# Altium PCB Bing Bong.PcbDoc
Units mm, origin at the board's own origin, x right, y up, seen from the top; angles counter-clockwise.
Board outline 152.4 x 101.6 mm, 4 copper layers (Top Layer, GND, PWR, Bottom Layer), stack 0.603 mm thick; 143 components, 92 nets, 472 pads, 8 vias.
Unrouted connection lines stored in the file: 266.
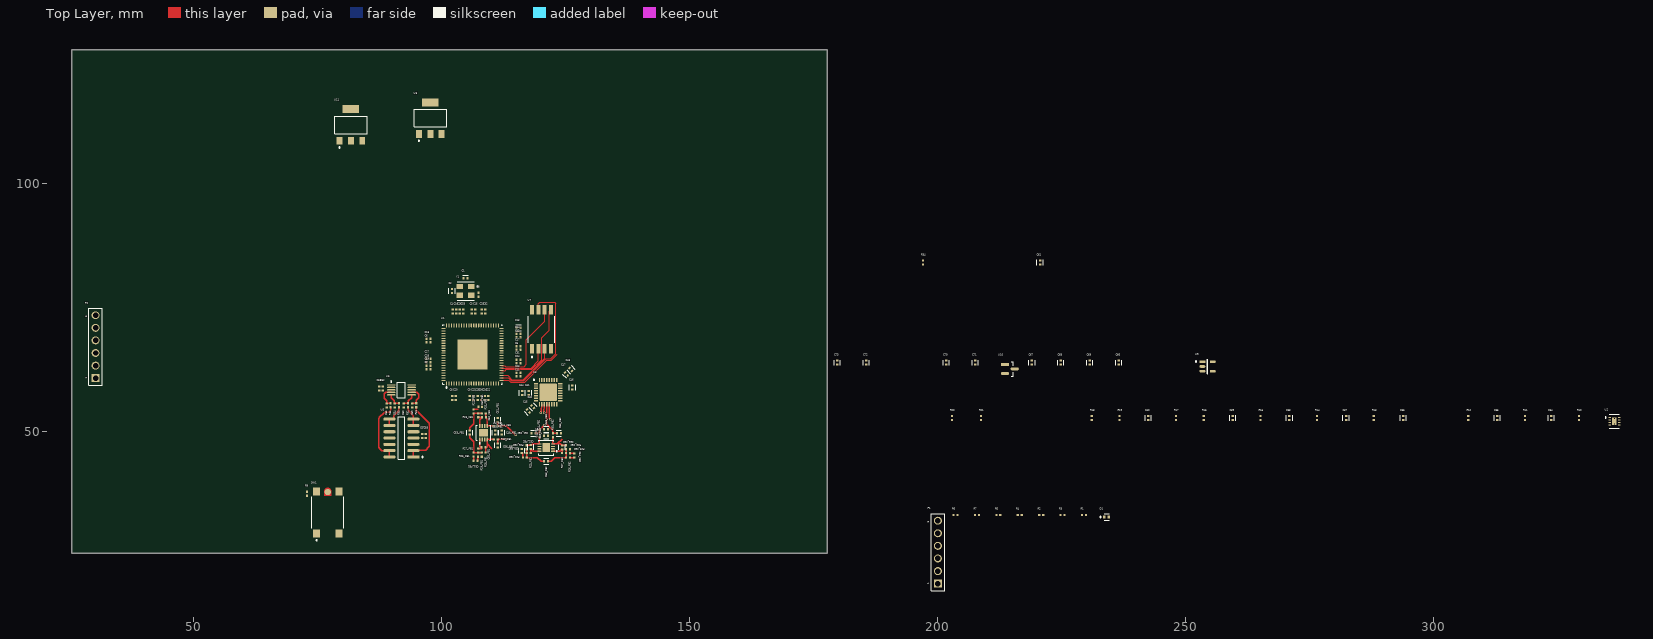
[diagram p0: Top Layer view]
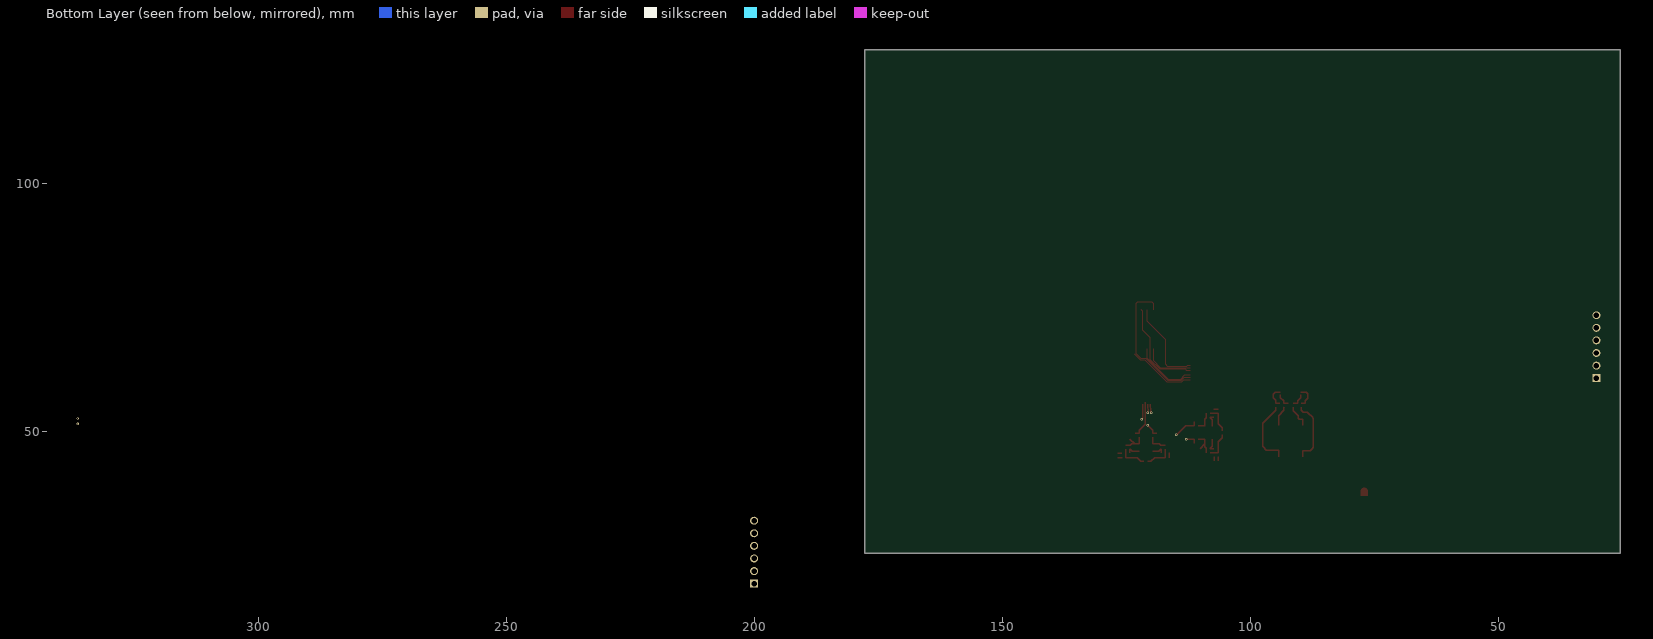
[diagram p1: Bottom Layer view, seen from below]
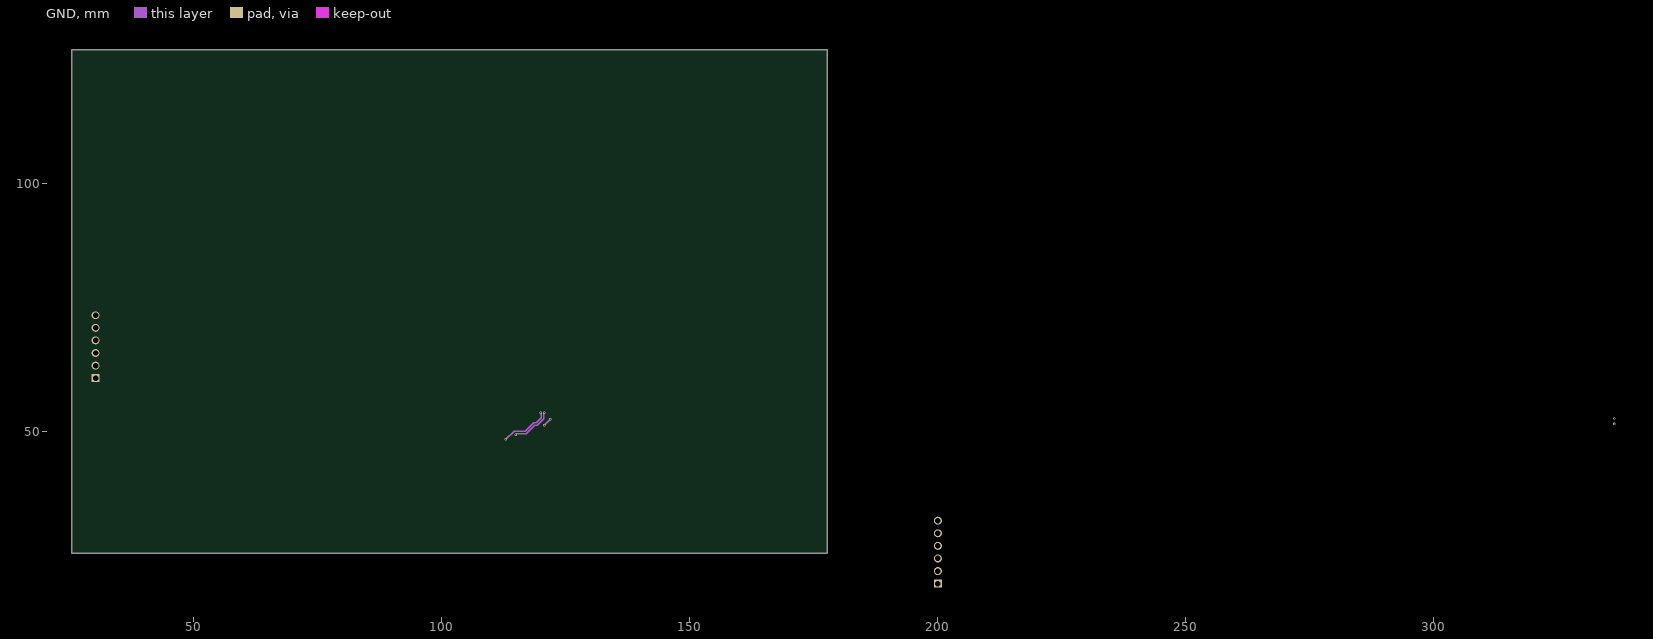
[diagram p2: GND]

## Layer stack, top to bottom
Top Solder: solder mask 0.0102, Solder Resist, Dk 3.5
Top Layer: signal copper 0.0356
Dielectric 2: prepreg 0.0711, PP-006, Dk 4.1
GND: signal copper 0.035
Dielectric 1: dielectric 0.32, FR-4, Dk 4.8
PWR: signal copper 0.035
Dielectric 3: prepreg 0.0711, PP-006, Dk 4.1
Bottom Layer: signal copper 0.0356
Bottom Solder: solder mask 0.0102, Solder Resist, Dk 3.5

## Board outline
25.4,25.4 177.8,25.4 177.8,127 25.4,127

## Design rules (kind name [scope] priority, off if disabled: settings)
Clearance [All] p1: gap=0.254 ignorepadtopadclearanceinfootprint=TRUE except(0.13: Arc-Arc Arc-Track Arc-SMDPad Track-Track Track-SMDPad; 0.2: Arc-THPad Arc-Via Track-THPad Track-Via SMDPad-SMDPad SMDPad-THPad SMDPad-Via THPad-THPad THPad-Via Via-Via)
DiffPairsRouting [All] p1: maxlimit=0.254 minlimit=0.2 mostfreqgap=0.254 toplayer_minwidth=0.1 toplayer_maxwidth=0.381 toplayer_prefwidth=0.381 midlayer1_minwidth=0.1 midlayer1_maxwidth=0.381 midlayer1_prefwidth=0.381 midlayer2_minwidth=0.1 midlayer2_maxwidth=0.381 midlayer2_prefwidth=0.381 bottomlayer_minwidth=0.1 bottomlayer_maxwidth=0.381 bottomlayer_prefwidth=0.381 maxuncoupledlength=12.7
PolygonConnect [All] p1: connectstyle=Relief reliefconductorwidth=0.254 reliefentries=4 polygonreliefangle="90 Angle" airgapwidth=0.254
RoomDefinition FB1 [InComponentClass('FB1')] p1: confinementstyle=ConfineIn formatcopy=TRUE lockcomponents=FALSE outline 104.95,43.25 112.95,43.25 112.95,55.575 104.95,55.575
RoomDefinition FB2 [InComponentClass('FB2')] p2: confinementstyle=ConfineIn formatcopy=TRUE lockcomponents=FALSE outline 127.6,43.25 127.6,51.25 112.95,51.25 112.95,43.25
RoutingVias [All] p1: holewidth=0.3 width=0.5 viastyle="Through Hole" minholewidth=0.2 minwidth=0.4 maxholewidth=1.27 maxwidth=1.27
SolderMaskExpansion [All] p1: expansion=0.102 istentingtop=FALSE
Width [All] p1: maxlimit=5 minlimit=0.1 preferedwidth=0.254 midlayer1_minwidth=0.254 midlayer1_maxwidth=0.254 midlayer2_minwidth=0.254 midlayer2_maxwidth=0.254 minimp=50.000000 maximp=50.000000 favimp=50.000000
29 further rules are at their usual default settings.

## Classes and differential pairs
net class IN_P[1..2]: IN_P1 IN_P2
net class IN_N[1..2]: IN_N1 IN_N2
channel class "Filters n Buffers": FB1 FB2
net class "Au In [1..2]": "Au In 1" "Au In 2"
component class FB2: C48_FB2 C49_FB2 C50_FB2 C51_FB2 C52_FB2 C53_FB2 C54_FB2 C55_FB2 C56_FB2 R22_FB2 R23_FB2 R24_FB2 R25_FB2 R26_FB2 R27_FB2 R28_FB2 R29_FB2 R30_FB2 U4_FB2
component class FB1: C48_FB1 C49_FB1 C50_FB1 C51_FB1 C52_FB1 C53_FB1 C54_FB1 C55_FB1 C56_FB1 R22_FB1 R23_FB1 R24_FB1 R25_FB1 R26_FB1 R27_FB1 R28_FB1 R29_FB1 R30_FB1 U4_FB1
component class Designator: C57 C58 C59 C60 C61 C62 C63 C64 C65 P2 R31 R32 R33 R34 R35 U5 U6 U7
differential pair IN2: +IN_P2 -IN_N2
differential pair IN1: +IN_P1 -IN_N1

## Components (designator, comment, footprint, x,y, rotation, side; value= is the part's Value field where it differs from the comment)
C1 "18pF" FP-GRM15-MFG 104.825,80.875 r0 top value=0.10μF
C2 "18pF" FP-GRM15-MFG 102.1,78.325 r270 top value=0.10μF
C3 "1uF" FP-GRM15-MFG 106.125,74.2 r270 top value=0.10μF
C4 "1uF" FP-GRM15-MFG 102.225,74.175 r270 top value=0.10μF
C5 "1uF" FP-GRM15-MFG 115.525,66.45 r180 top value=0.10μF
C6 "1uF" FP-GRM15-MFG 97.325,67.975 r0 top value=0.10μF
C7 "1uF" FP-GRM15-MFG 97.325,62.575 r0 top value=0.10μF
C8 "1uF" FP-GRM15-MFG 102.125,56.75 r90 top value=0.10μF
C9 "1uF" FP-GRM15-MFG 105.7,56.75 r90 top value=0.10μF
C10 "1uF" FP-GRM15-MFG 108.7,56.75 r90 top value=0.10μF
C11 "1uF" FP-GRM15-MFG 115.55,61.1 r180 top value=0.10μF
C12 "1uF" FP-GRM15-MFG 115.525,68.975 r180 top value=0.10μF
C13 "47pF" FP-GRM15-MFG 115.525,70.9 r180 top value=0.10μF
C14 "0.1uF" FP-GRM15-MFG 115.525,69.675 r180 top value=0.10μF
C15 "0.1uF" FP-GRM15-MFG 106.825,74.2 r270 top value=0.10μF
C16 "0.1uF" FP-GRM15-MFG 102.919,74.175 r270 top value=0.10μF
C17 "0.1uF" FP-GRM15-MFG 115.526,67.149 r180 top value=0.10μF
C18 "0.1uF" FP-GRM15-MFG 97.325,68.675 r0 top value=0.10μF
C19 "0.1uF" FP-GRM15-MFG 97.325,63.275 r0 top value=0.10μF
C20 "0.1uF" FP-GRM15-MFG 102.825,56.75 r90 top value=0.10μF
C21 "0.1uF" FP-GRM15-MFG 106.4,56.75 r90 top value=0.10μF
C22 "0.1uF" FP-GRM15-MFG 109.4,56.75 r90 top value=0.10μF
C23 "0.1uF" FP-GRM15-MFG 115.55,61.801 r180 top value=0.10μF
C24 "0.1uF" FP-GRM15-MFG 115.55,63.806 r180 top value=0.10μF
C25 "0.1uF" FP-GRM15-MFG 108.1,74.2 r270 top value=0.10μF
C26 "0.1uF" FP-GRM15-MFG 103.625,74.175 r270 top value=0.10μF
C27 "0.1uF" FP-GRM15-MFG 97.325,64.675 r0 top value=0.10μF
C28 "0.1uF" FP-GRM15-MFG 97.325,63.975 r0 top value=0.10μF
C29 "1uF" FP-GRM15-MFG 107.25,56.757 r90 top value=0.10μF
C30 "1uF" FP-GRM15-MFG 107.95,56.75 r90 top value=0.10μF
C31 "1uF" FP-GRM15-MFG 115.55,64.5 r180 top value=0.10μF
C32 "1uF" FP-GRM15-MFG 108.8,74.2 r270 top value=0.10μF
C33 "1uF" FP-GRM15-MFG 104.325,74.175 r270 top value=0.10μF
C34 "1nF" FP-GRM15-MFG 323.85,52.705 r90 top value=0.10μF
C35 "10uF" FP-GRM15-MFG 312.928,52.705 r90 top value=0.10μF
C36 "10uF" FP-GRM15-MFG 294.005,52.705 r90 top value=0.10μF
C37 "1nF" FP-GRM15-MFG 282.448,52.705 r90 top value=0.10μF
C38 "1nF" FP-GRM15-MFG 271.018,52.705 r90 top value=0.10μF
C39 "10uF" FP-GRM15-MFG 259.588,52.705 r90 top value=0.10μF
C40 "1nF" FP-GRM15-MFG 242.57,52.705 r90 top value=0.10μF
C41 "0.1uF" FP-GRM15-MFG 117.55,57.75 r270 top value=0.10μF
C42 "0.1uF" FP-GRM15-MFG 118.392,54.983 r135 top value=0.10μF
C43 "0.1uF" FP-GRM15-MFG 126.05,62.5 r315 top value=0.10μF
C44 "10uF" FP-GRM15-MFG 116.3,57.75 r270 top value=0.10μF
C45 "10uF" FP-GRM15-MFG 117.492,54.108 r135 top value=0.10μF
C46 "0.1uF" FP-GRM15-MFG 126.4,58.875 r90 top value=0.10μF
C47 "10uF" FP-GRM15-MFG 125.167,61.608 r315 top value=0.10μF
C48_FB1 "1uF" FP-GRM15-MFG 112.125,49.75 r270 top value=0.10μF (schematic designator C48)
C48_FB2 "1uF" FP-GRM15-MFG 121.1,50.425 r0 top value=0.10μF (schematic designator C48)
C49_FB1 "0.1uF" FP-GRM15-MFG 110.825,49.75 r270 top value=0.10μF (schematic designator C49)
C49_FB2 "0.1uF" FP-GRM15-MFG 121.1,49.125 r0 top value=0.10μF (schematic designator C49)
C50_FB1 "10uF" FP-GRM15-MFG 107.8,54.95 r0 top value=0.10μF (schematic designator C50)
C50_FB2 "10uF" FP-GRM15-MFG 116.15,46.1 r90 top value=0.10μF (schematic designator C50)
C51_FB1 "DNP!" FP-GRM15-MFG 111.325,52.325 r270 top value=0.10μF (schematic designator C51)
C51_FB2 "DNP!" FP-GRM15-MFG 118.525,49.625 r0 top value=0.10μF (schematic designator C51)
C52_FB1 "1nF" FP-GRM15-MFG 108.525,52.85 r0 top value=0.10μF (schematic designator C52)
C52_FB2 "1nF" FP-GRM15-MFG 118,46.85 r90 top value=0.10μF (schematic designator C52)
C53_FB1 "6.8nF" FP-GRM15-MFG 105.7,49.75 r90 top value=0.10μF (schematic designator C53)
C53_FB2 "6.8nF" FP-GRM15-MFG 121.1,44 r180 top value=0.10μF (schematic designator C53)
C54_FB1 "10uF" FP-GRM15-MFG 106.85,44.05 r180 top value=0.10μF (schematic designator C54)
C54_FB2 "10uF" FP-GRM15-MFG 126.8,45.15 r270 top value=0.10μF (schematic designator C54)
C55_FB1 "1nF" FP-GRM15-MFG 108.5,46.8 r180 top value=0.10μF (schematic designator C55)
C55_FB2 "1nF" FP-GRM15-MFG 124.3,46.8 r270 top value=0.10μF (schematic designator C55)
C56_FB1 "DNP!" FP-GRM15-MFG 111.325,47.2 r90 top value=0.10μF (schematic designator C56)
C56_FB2 "DNP!" FP-GRM15-MFG 123.65,49.625 r180 top value=0.10μF (schematic designator C56)
C57 "0.1uF" FP-GRM15-MFG 96.125,49.1 r270 top value=0.10μF
C58 "1uF" FP-GRM15-MFG 96.825,49.1 r270 top value=0.10μF
C59 "0.1uF" FP-GRM15-MFG 94.1,55.275 r90 top value=0.10μF
C60 "0.1uF" FP-GRM15-MFG 92.4,55.275 r90 top value=0.10μF
C61 "47pF" FP-GRM15-MFG 220.726,84.074 r90 top value=0.10μF
C62 "0.1uF" FP-GRM15-MFG 88.1,58.675 r90 top value=0.10μF
C63 "1uF" FP-GRM15-MFG 87.4,58.675 r90 top value=0.10μF
C64 "0.1uF" FP-GRM15-MFG 90.6,55.275 r90 top value=0.10μF
C65 "0.1uF" FP-GRM15-MFG 88.9,55.275 r90 top value=0.10μF
C66 "0.47uF" FP-GRM15-MFG 236.601,63.881 r90 top value=0.10μF
C67 "0.47uF" FP-GRM15-MFG 219.075,63.881 r90 top value=0.10μF
C68 "0.47uF" FP-GRM15-MFG 224.917,63.881 r90 top value=0.10μF
C69 "0.47uF" FP-GRM15-MFG 230.759,63.881 r90 top value=0.10μF
C70 "0.47uF" FP-GRM15-MFG 201.803,63.881 r90 top value=0.10μF
C71 "0.47uF" FP-GRM15-MFG 207.645,63.881 r90 top value=0.10μF
C72 "0.47uF" FP-GRM15-MFG 185.674,63.881 r90 top value=0.10μF
C73 "0.47uF" FP-GRM15-MFG 179.832,63.881 r90 top value=0.10μF
D1 "SML-P11UTT86" FP-SML-P11UTT86-MFG 234.151,32.766 r0 top
P1 "61300611121" 61300611121 200.115,25.654 r90 top
P2 "61300611121" 61300611121 30.2,67.1 r90 top
R1 "2K2" RESC1005X40X25LL05T05 229.579,33.147 r0 top
R2 "0R" RESC1005X40X25LL05T05 220.943,33.147 r0 top
R3 "DNP!" RESC1005X40X25LL05T05 225.261,33.147 r0 top
R4 "2K2" RESC1005X40X25LL05T05 216.625,33.147 r0 top
R5 "2K2" RESC1005X40X25LL05T05 212.307,33.147 r0 top
R6 "DNP!" RESC1005X40X25LL05T05 203.671,33.147 r0 top
R7 "0R" RESC1005X40X25LL05T05 207.989,33.147 r0 top
R8 "2K" RESC1005X40X25LL05T05 107.425,77.6 r270 top
R9 "10K" RESC1005X40X25LL05T05 72.85,37.45 r270 top
R10 "5K" RESC1005X40X25LL05T05 329.438,52.705 r90 top
R11 "10K" RESC1005X40X25LL05T05 318.516,52.705 r90 top
R12 "10K" RESC1005X40X25LL05T05 307.086,52.705 r90 top
R13 "5K" RESC1005X40X25LL05T05 288.036,52.705 r90 top
R14 "5K" RESC1005X40X25LL05T05 276.606,52.705 r90 top
R15 "10K" RESC1005X40X25LL05T05 265.176,52.705 r90 top
R16 "10K" RESC1005X40X25LL05T05 253.746,52.705 r90 top
R17 "5K" RESC1005X40X25LL05T05 248.158,52.705 r90 top
R18 "0R" RESC1005X40X25LL05T05 231.14,52.705 r90 top
R19 "0R" RESC1005X40X25LL05T05 236.728,52.705 r90 top
R20 "0R" RESC1005X40X25LL05T05 202.946,52.705 r90 top
R21 "0R" RESC1005X40X25LL05T05 208.788,52.705 r90 top
R22_FB1 "1K" RESC1005X40X25LL05T05 106.45,54.05 r270 top (schematic designator R22)
R22_FB2 "1K" RESC1005X40X25LL05T05 116.8,44.75 r0 top (schematic designator R22)
R23_FB1 "2K" RESC1005X40X25LL05T05 107.375,53.25 r270 top (schematic designator R23)
R23_FB2 "2K" RESC1005X40X25LL05T05 117.6,45.675 r0 top (schematic designator R23)
R24_FB1 "0R" RESC1005X40X25LL05T05 110.925,51.125 r0 top (schematic designator R24)
R24_FB2 "0R" RESC1005X40X25LL05T05 119.725,49.225 r90 top (schematic designator R24)
R25_FB1 "2K" RESC1005X40X25LL05T05 108.5,53.65 r180 top (schematic designator R25)
R25_FB2 "2K" RESC1005X40X25LL05T05 117.2,46.8 r270 top (schematic designator R25)
R26_FB1 "1K" RESC1005X40X25LL05T05 106.45,45.35 r90 top (schematic designator R26)
R26_FB2 "1K" RESC1005X40X25LL05T05 125.5,44.75 r180 top (schematic designator R26)
R27_FB1 "2K" RESC1005X40X25LL05T05 107.375,46.15 r90 top (schematic designator R27)
R27_FB2 "2K" RESC1005X40X25LL05T05 124.7,45.675 r180 top (schematic designator R27)
R28_FB1 "2K" RESC1005X40X25LL05T05 108.5,45.75 r180 top (schematic designator R28)
R28_FB2 "2K" RESC1005X40X25LL05T05 125.1,46.8 r270 top (schematic designator R28)
R29_FB1 "10K" RESC1005X40X25LL05T05 107.725,44.925 r0 top (schematic designator R29)
R29_FB2 "10K" RESC1005X40X25LL05T05 125.925,46.025 r90 top (schematic designator R29)
R30_FB1 "0R" RESC1005X40X25LL05T05 110.925,48.4 r0 top (schematic designator R30)
R30_FB2 "0R" RESC1005X40X25LL05T05 122.45,49.225 r90 top (schematic designator R30)
R31 "100R" RESC1005X40X25LL05T05 94.9,55.275 r270 top
R32 "100R" RESC1005X40X25LL05T05 93.2,55.275 r270 top
R33 "100R" RESC1005X40X25LL05T05 91.4,55.275 r270 top
R34 "10K" RESC1005X40X25LL05T05 197.104,84.074 r90 top
R35 "100R" RESC1005X40X25LL05T05 89.7,55.275 r270 top
SW1 "FSM1LP" FP-FSM1LP-MFG 77.037,33.648 r90 top
U1 "ADSP-BF706" FP-CP-88-8-IPC_C 106.244,65.543 r90 top
U2 "OPA2991IDSGR" FP-DSG0008A-MFG 336.55,52.07 r0 top
U3 "ADAU1761" LFCSP-32 121.5,57.925 r0 top
U4_FB1 "AD8137YCPZ-REEL7" FP-CP-8-13-IPC_C 108.45,49.75 r90 top (schematic designator U4)
U4_FB2 "AD8137YCPZ-REEL7" FP-CP-8-13-IPC_C 121.1,46.75 r180 top (schematic designator U4)
U5 "LM2902DR" FP-D0014A-IPC_A 91.9,48.675 r180 top
U6 "ADC084S021CIMM/NOPB" MUB10A_N 91.9,58.375 r0 top
U7 "W25Q32FVSSIG" FP-SS-MFG 120.15,70.6 r90 top
U8 "ZLDO1117QG33TA" FP-SOT223-MFG 97.725,113.2 r90 top
U9 "TLV73311PDBVT" FP-DBV0005A-IPC_C 254.508,63.119 r0 top
U10 "AP2120N-1.8TRG1" FP-SOT23-IPC_A 214.63,62.611 r0 top
U11 "ZLDO1117QG33TA" FP-SOT223-MFG 81.7,111.85 r90 top
Y1 "ABM8-25.000MHZ-B2-T" FP-ABM8-MFG 104.85,78.375 r180 top

## Footprints (in the part's own frame and the unit in brackets; to place one, negate y for a bottom-side part, rotate by r counter-clockwise, add the part's x,y. Pads: shape width x height; smd on the part's side, far side on the other; paste and mask are expansions set on the pad)
61300611121 [mm] "Pin Header, pitch 2.54 mm, THT, Vertical, single row, 6p"
  rect 1.6x1.6 hole 1.1: 1(-6.35,0)
  round 1.6 hole 1.1: 2(-3.81,0) 3(-1.27,0) 4(1.27,0) 5(3.81,0) 6(6.35,0)
  silkscreen extent -7.77,-1.35 7.77,1.35, body extent -7.62,-1.27 7.62,1.27, height 8.57
FP-ABM8-MFG [mm]
  rect 1.3x1.05 smd paste+0 mask+0: 1(-1.15,-0.875) 2(1.15,-0.875) 3(1.15,0.875) 4(-1.15,0.875)
  silkscreen extent -2.5,-1.88 1.7,1.88, body extent -1.9,-1.5 1.9,1.5, height 0.25
FP-CP-8-13-IPC_C [mm]
  rect 0.81x0.242 smd paste+0 mask+0: 1(-1.351,0.75)
  rrect100% 0.81x0.242 smd paste+0 mask+0: 2(-1.351,0.25) 3(-1.351,-0.25) 4(-1.351,-0.75) 5(1.351,-0.75) 6(1.351,-0.25) 7(1.351,0.25) 8(1.351,0.75)
  rect 1.55x1.84 smd paste-1000 mask+0: 9(0,0)
  silkscreen extent -2.28,-1.5 1.5,1.5, body extent -1.86,-1.6 1.86,1.6, height 0.25
FP-CP-88-8-IPC_C [mm]
  rect 0.81x0.222 smd paste+0 mask+0: 1(-5.851,5.25)
  rrect100% 0.81x0.222 smd paste+0 mask+0: 2(-5.851,4.75) 3(-5.851,4.25) 4(-5.851,3.75) 5(-5.851,3.25) 6(-5.851,2.75) 7(-5.851,2.25) 8(-5.851,1.75) 9(-5.851,1.25) 10(-5.851,0.75) 11(-5.851,0.25) 12(-5.851,-0.25) 13(-5.851,-0.75) 14(-5.851,-1.25) 15(-5.851,-1.75) 16(-5.851,-2.25) 17(-5.851,-2.75) 18(-5.851,-3.25) 19(-5.851,-3.75) 20(-5.851,-4.25) 21(-5.851,-4.75) 22(-5.851,-5.25) 45(5.851,-5.25) 46(5.851,-4.75) 47(5.851,-4.25) 48(5.851,-3.75) 49(5.851,-3.25) 50(5.851,-2.75) 51(5.851,-2.25) 52(5.851,-1.75) 53(5.851,-1.25) 54(5.851,-0.75) 55(5.851,-0.25) 56(5.851,0.25) 57(5.851,0.75) 58(5.851,1.25) 59(5.851,1.75) 60(5.851,2.25) 61(5.851,2.75) 62(5.851,3.25) 63(5.851,3.75) 64(5.851,4.25) 65(5.851,4.75) 66(5.851,5.25)
  rrect100% 0.222x0.81 smd paste+0 mask+0: 23(-5.25,-5.851) 24(-4.75,-5.851) 25(-4.25,-5.851) 26(-3.75,-5.851) 27(-3.25,-5.851) 28(-2.75,-5.851) 29(-2.25,-5.851) 30(-1.75,-5.851) 31(-1.25,-5.851) 32(-0.75,-5.851) 33(-0.25,-5.851) 34(0.25,-5.851) 35(0.75,-5.851) 36(1.25,-5.851) 37(1.75,-5.851) 38(2.25,-5.851) 39(2.75,-5.851) 40(3.25,-5.851) 41(3.75,-5.851) 42(4.25,-5.851) 43(4.75,-5.851) 44(5.25,-5.851) 67(5.25,5.851) 68(4.75,5.851) 69(4.25,5.851) 70(3.75,5.851) 71(3.25,5.851) 72(2.75,5.851) 73(2.25,5.851) 74(1.75,5.851) 75(1.25,5.851) 76(0.75,5.851) 77(0.25,5.851) 78(-0.25,5.851) 79(-0.75,5.851) 80(-1.25,5.851) 81(-1.75,5.851) 82(-2.25,5.851) 83(-2.75,5.851) 84(-3.25,5.851) 85(-3.75,5.851) 86(-4.25,5.851) 87(-4.75,5.851) 88(-5.25,5.851)
  rect 6x6 smd paste-1000 mask+0: 89(0,0)
  silkscreen extent -6.78,-6 6,6, body extent -6.36,-6.36 6.36,6.36, height 0.25
FP-D0014A-IPC_A [mm]
  rect 2.474x0.622 smd paste+0 mask+0: 1(-2.416,3.81)
  rrect100% 2.474x0.622 smd paste+0 mask+0: 2(-2.416,2.54) 3(-2.416,1.27) 4(-2.416,0) 5(-2.416,-1.27) 6(-2.416,-2.54) 7(-2.416,-3.81) 8(2.416,-3.81) 9(2.416,-2.54) 10(2.416,-1.27) 11(2.416,0) 12(2.416,1.27) 13(2.416,2.54) 14(2.416,3.81)
  silkscreen extent -4.38,-4.33 0.68,4.33, body extent -4.15,-4.82 4.15,4.82, height 0.25
FP-DBV0005A-IPC_C [mm]
  rect 1.205x0.532 smd paste+0 mask+0: 1(-1.05,0.95)
  rrect100% 1.205x0.532 smd paste+0 mask+0: 2(-1.05,0) 3(-1.05,-0.95) 4(1.05,-0.95) 5(1.05,0.95)
  silkscreen extent -2.45,-1.45 0.05,1.45, body extent -1.75,-1.55 1.75,1.55, height 0.25
FP-DSG0008A-MFG [mm]
  rrect40% 0.5x0.25 smd paste+0 mask+0: 1(-0.95,0.75) 2(-0.95,0.25) 3(-0.95,-0.25) 4(-0.95,-0.75) 5(0.95,-0.75) 6(0.95,-0.25) 7(0.95,0.25) 8(0.95,0.75)
  rrect11% 0.9x1.6 smd paste-1000 mask+0: 9(0,0)
  silkscreen extent -1.87,-1.39 1,1.4, body extent -1.3,-1.15 1.3,1.15, height 0.25
FP-FSM1LP-MFG [mm]
  rect 1.6x1.395 smd paste+0 mask+0: 1(-4.205,2.248) 2(4.205,2.248) 3(-4.205,-2.248) 4(4.205,-2.248)
  round 1.26 smd paste+0 mask+0: 5(4.139,0)
  Top Layer region: 3.405,0.7 4.307,0.7 4.574,0.647 4.801,0.496 4.952,0.269 5.005,0.002 5.005,0.002 5.005,-0.002 4.952,-0.269 4.801,-0.496 4.574,-0.647 4.307,-0.7 4.307,-0.7 3.405,-0.7
  silkscreen extent -5.72,-3.25 3.15,3.25, body extent -5.1,-3.35 5.11,3.35, height 0.25
FP-GRM15-MFG [mm]
  rect 0.4x0.5 smd paste+0 mask+0: 1(-0.4,0) 2(0.4,0)
  silkscreen extent -0.53,-0.63 0.53,0.63, body extent -0.7,-0.38 0.7,0.38, height 0.25
FP-SML-P11UTT86-MFG [mm]
  rect 0.5x0.6 smd paste+0 mask+0: 1(-0.45,0) 2(0.45,0)
  silkscreen extent -1.37,-0.67 0.53,0.67, body extent -0.8,-0.43 0.8,0.43, height 0.25
FP-SOT23-IPC_A [mm]
  rect 1.659x0.627 smd paste+0 mask+0: 1(-0.977,0.915)
  rrect100% 1.659x0.627 smd paste+0 mask+0: 2(-0.977,-0.915) 3(0.977,0)
  silkscreen extent 0.23,-1.45 0.65,1.45, body extent -2.31,-1.95 2.31,1.95, height 0.25
FP-SOT223-MFG [mm]
  rect 1.6x1.2 smd paste+0 mask+0: 1(-3.2,2.3) 2(-3.2,0) 3(-3.2,-2.3)
  rect 1.6x3.3 smd paste+0 mask+0: 4(3.2,0)
  silkscreen extent -4.67,-3.27 1.78,3.27, body extent -4.1,-3.37 4.1,3.37, height 0.25
FP-SS-MFG [mm]
  rect 1.9x0.8 smd paste-1000 mask+0: 1(-3.95,1.905) 2(-3.95,0.635) 3(-3.95,-0.635) 4(-3.95,-1.905) 5(3.95,-1.905) 6(3.95,-0.635) 7(3.95,0.635) 8(3.95,1.905)
  silkscreen extent -5.71,-2.69 2.69,2.69, body extent -5,-2.79 5,2.79, height 0.25
LFCSP-32 [mm] "SIGMADSP CODEC"
  rect 0.85x0.3 smd: 1(-2.45,1.75) 2(-2.45,1.25) 3(-2.45,0.75) 4(-2.45,0.25) 5(-2.45,-0.25) 6(-2.45,-0.75) 7(-2.45,-1.25) 8(-2.45,-1.75) 17(2.45,-1.75) 18(2.45,-1.25) 19(2.45,-0.75) 20(2.45,-0.25) 21(2.45,0.25) 22(2.45,0.75) 23(2.45,1.25) 24(2.45,1.75)
  rect 0.3x0.85 smd: 9(-1.75,-2.45) 10(-1.25,-2.45) 11(-0.75,-2.45) 12(-0.25,-2.45) 13(0.25,-2.45) 14(0.75,-2.45) 15(1.25,-2.45) 16(1.75,-2.45) 25(1.75,2.45) 26(1.25,2.45) 27(0.75,2.45) 28(0.25,2.45) 29(-0.25,2.45) 30(-0.75,2.45) 31(-1.25,2.45) 32(-1.75,2.45)
  rrect10% 3.5x3.5 smd: 33(0,0)
  silkscreen extent -3,2.38 -2.75,2.62, body extent -2.55,-2.55 2.55,2.55, height 1
MUB10A_N [mm] "TSSOP, 10-Leads, Body 3x3mm, Pitch 0.5mm, IPC Medium Density"
  oval 1.7x0.3 smd: 1(-2.05,1) 2(-2.05,0.5) 3(-2.05,0) 4(-2.05,-0.5) 5(-2.05,-1) 6(2.05,-1) 7(2.05,-0.5) 8(2.05,0) 9(2.05,0.5) 10(2.05,1)
  silkscreen extent -2.17,-1.55 0.8,1.82, body extent -1.55,-1.55 1.55,1.55, height 1.09
RESC1005X40X25LL05T05 [mm] "Chip Resistor, 2-Leads, Body 1.05x0.55mm, IPC High Density"
  rect 0.45x0.45 smd: 1(-0.4,0) 2(0.4,0)
  body extent -0.53,-0.28 0.53,0.28, height 0.4

## Part data
C1 C2 C3 C4 C5 C6 C7 C8 C9 C10 C11 C12 C13 C14 C15 C16 C17 C18 C19 C20 C21 C22 C23 C24 C25 C26 C27 C28 C29 C30 C31 C32 C33 C34 C35 C36 C37 C38 C39 C40 C41 C42 C43 C44 C45 C46 C47 C48_FB1 C48_FB2 C49_FB1 C49_FB2 C50_FB1 C50_FB2 C51_FB1 C51_FB2 C52_FB1 C52_FB2 C53_FB1 C53_FB2 C54_FB1 C54_FB2 C55_FB1 C55_FB2 C56_FB1 C56_FB2 C57 C58 C59 C60 C61 C62 C63 C64 C65 C66 C67 C68 C69 C70 C71 C72 C73: library part CMP-2100-03641-2, "CAP CER 0.1UF 16V X7R 0402", Capacitance=0.10μF, Manufacturer=Murata, Manufacturer Part Number=GRM155R71C104KA88D, Package=GRM15, Temperature="-55°C to +125°C", Temperature Characteristic=X7R, Temperature Range High=+125°C, Temperature Range Low=-55°C, Tolerance=10%, Voltage Rating=16Vdc, Category=Cap, ComponentLink2Description=Datasheet, ComponentLink2URL=https://search.murata.co.jp/Ceramy/image/img/A01X/G101/ENG/GRM155R71H471KA01-01A.pdf, Device Class L1="Passive Components", Device Class L2=Capacitors, Device Class L3="Ceramic Capacitors", Digikey Description="CAP CER 0.1UF 16V X7R 0402", Height=0.55mm, Ipc Land Pattern Name=CAPC10050X219, Lead Free=yes, Material=Ceramic, Mouser Description="0402 0.1 uF 16V ±10 % Tolerance X7R SMT Multilayer Ceramic Capacitor", Octopart=https://octopart.com/grm155r71c104ka88d-murata-196880, RoHS=TRUE, Standoff Height=0mm
D1: library part CMP-08952-000028-1, "LED RED CLEAR 1006 SMD", Case Code (Imperial)=0402, Case Code (Metric)=1005, Color=Red, Forward Current=20mA, Forward Voltage=1.8V, Lens Color=Colorless, Max Operating Temperature=85°C, Min Operating Temperature=-40°C, Package Quantity=1, Test Current=1mA, Case/Package=0402, Dominant Wavelength=621nm, Height=0.25mm, Illumination Color=Red, Lead Free="Lead Free", Length=1mm, Lens Style=Square, Lens Transparency=Clear, Luminous Intensity=5.5mcd, Mount="Surface Mount", Number of LEDs=1, Number of Pins=2, Packaging="Tape and Reel", Radiation Hardening=No, REACH SVHC="No SVHC", RoHS Compliant=Yes, Series=PicoLED™, Viewing Angle=150°, Wavelength=621nm, Width=0.6mm
P1 P2: library part CMP-1502-01070-1, "THT Vertical Pin Header WR-PHD, Pitch 2.54 mm, Single Row, 6 pins", Contact Resistance=20mOhm, Manufacturer="Wurth Elektronik", Operating Temperature=-40to105degC, Rated Current=3A, Withstanding Voltage=500VAC, Working Voltage=250VAC, Datasheet URL=https://katalog.we-online.de/em/datasheet/6130xx11121.pdf, Gender=Male, Manufacturer URL=http://www.we-online.de, Mounting Technology=THT, Orientation=Vertical, Package Reference=61300611121, Packaging=Bag, Part Number=61300611121, Pin Number=6, Pitch=2.54mm, Publisher=WurthElektronik, Row Number=Single
R1 R2 R3 R4 R5 R6 R7 R8 R9 R10 R11 R12 R13 R14 R15 R16 R17 R18 R19 R20 R21 R22_FB1 R22_FB2 R23_FB1 R23_FB2 R24_FB1 R24_FB2 R25_FB1 R25_FB2 R26_FB1 R26_FB2 R27_FB1 R27_FB2 R28_FB1 R28_FB2 R29_FB1 R29_FB2 R30_FB1 R30_FB2 R31 R32 R33 R34 R35: library part CMP-2000-07451-1, "Chip Resistor, 0 Ohm, 0.1 W, -55 to 155 degC, 0402 (1005 Metric), RoHS, Tape and Reel", Case Code (Imperial)=0402, Case Code (Metric)=1005, Manufacturer=Panasonic, Max Operating Temperature=155degC, Max Power Dissipation=100mW, Min Operating Temperature=-55degC, Package Description="2-Pin Surface Mount Device, Body 1 x 0.5 mm", Package Quantity=1, Package Reference=402, Resistance=0mOhm, Temperature Coefficient=600ppm/��C, Tolerance=5%, Voltage Rating=50V, Case/Package=0402, Composition=ThickFilm, Contact Plating=Tin, Datasheet URL=https://industrial.panasonic.com/cdbs/www-data/pdf/RDA0000/AOA0000C301.pdf, Datasheet Version=03/2015, Depth=0.5mm, Height=0.35mm, Lead Free=LeadFree, Length=1mm, Manufacturer URL=http://www.panasonic.com/, Military Standard=Not, Mount=SurfaceMount, Mounting Technology=SurfaceMount, Number of Terminations=2, Packaging=TapeandReel, Power Rating=100mW, Radiation Hardening=No, REACH SVHC=NoSVHC, RoHSCompliant=True, Termination=SMD/SMT, Voltage Rating (DC)=50V, Width=0.02inch
SW1: library part CMP-03402-000015-1, "SWITCH TACTILE SPST-NO 0.05A 24V", Actuator Color=Black, Contact Current Rating=50mA, Contact Resistance=100mR, Max Operating Temperature=85°C, Max Voltage Rating (DC)=12V, Min Operating Temperature=-35°C, Operating Force=1.57N, Package Quantity=2000, Actuator Length=0.01inch, Actuator Material=Polyphthalamide, Actuator Type=Standard, Contact Material="Copper Alloy", Contact Plating=Silver, Current Rating=50mA, Depth=8mm, Electrical Life=100000Cycles, ELV=Compliant, Illumination Type=Non-Illuminated, Lead Free="Lead Free", Length=6.19mm, Max Current Rating=50mA, Mechanical Life=100000Cycles, Mount="Surface Mount", Orientation=Straight, Packaging="Loose Piece", REACH SVHC="No SVHC", RoHS Compliant=Yes, Series=FSM1LP, Switch Function=Off-Mom, Switch Travel=0.25mm, Termination="Gull Wing", Throw Configuration=SPST, Type=Switch, Voltage Rating (DC)=12V
U1: library part CMP-09089-000022-1, "IC DSP LP 128KB L2SR 88LFCSP", Frequency=200MHz, Max Operating Temperature=85°C, Min Operating Temperature=-40°C, Interface=I2C, Lead Free="Contains Lead", Max Frequency=200MHz, Memory Size=512KB, Mount="Surface Mount", Number of Pins=88, Packaging=Tray, RAM Size=128KB, RoHS Compliant=Yes
U2: library part CMP-04895-000388-1, "IC OPAMP GP 2 CIRCUIT", RoHS Compliant=Yes
U3: "Interface - CODECs Low Power Codec w/Sigma DSP"
U4_FB1 U4_FB2: library part CMP-09116-000220-1, "IC OPAMP DIFF 1 CIRCUIT 8LFCSP", Case/Package="LFCSP EP", Input Bias Current=900nA, Input Offset Voltage (Vos)=2.7mV, Input Resistance=800kR, Max Dual Supply Voltage=6V, Max Operating Temperature=125°C, Max Supply Current=245uA, Max Supply Voltage=12V, Min Dual Supply Voltage=1.35V, Min Operating Temperature=-40°C, Min Supply Voltage=2.7V, Nominal Supply Current=3.2mA, Operating Supply Current=3.6mA, Output Current per Channel=20mA, Package Quantity=1, Power Supply Rejection Ratio (PSRR)=79dB, Voltage Gain=89dB, -3db Bandwidth=110MHz, Amplifier Type=DIFFERENTIAL, Bandwidth=110MHz, Common Mode Rejection Ratio=66dB, Gain Bandwidth Product=110MHz, Height=0.8mm, Lead Free="Contains Lead", Length=3.1mm, Mount="Surface Mount", Number of Amplifiers=1, Number of Bits=12, Number of Channels=1, Number of Circuits=1, Number of Elements=1, Number of Pins=8, Packaging="Tape and Reel", Radiation Hardening=No, REACH SVHC="No SVHC", RoHS Compliant=Yes, Series=-, Settling Time=100ns, Slew Rate=450V/µs, Supply Current=3.2mA, Width=3.1mm
U5: library part CMP-04895-000441-1, "IC OPAMP GP 4 CIRCUIT 14SOIC", Case/Package=SOIC, Dual Supply Voltage=9V, Input Bias Current=250nA, Input Offset Voltage (Vos)=7mV, Max Dual Supply Voltage=13V, Max Operating Temperature=125°C, Max Supply Voltage=26V, Min Dual Supply Voltage=1.5V, Min Operating Temperature=-40°C, Min Supply Voltage=3V, Nominal Supply Current=3mA, Operating Supply Current=1.4mA, Output Current=30mA, Output Current per Channel=60mA, Package Quantity=1, Power Supply Rejection Ratio (PSRR)=50dB, Voltage Gain=100dB, Bandwidth=1.2MHz, Common Mode Rejection Ratio=50dB, Contact Plating=Tin, Gain Bandwidth Product=1.2MHz, Height=1.58mm, Lead Free="Lead Free", Length=8.65mm, Mount="Surface Mount", Number of Amplifiers=4, Number of Channels=4, Number of Circuits=4, Number of Elements=4, Number of Pins=14, Operating Supply Voltage=13V, Packaging="Tape and Reel", Radiation Hardening=No, REACH SVHC="No SVHC", Slew Rate=0.5V/µs, Unity Gain Bandwidth Product=1.2MHz, Width=3.91mm
U6: library part CMP-0054-00454-2, "4 Channel, 50 kSPS to 200 kSPS, 8-Bit A/D Converter, 10-pin Mini SOIC, Pb-Free", Manufacturer="National Semiconductor", PackageTopMarking=ZXTT*X19C, PowerWise=Y, Code_JEDEC=MO-187-BA, ComponentLink1Description="ADC084S021 Datasheet", ComponentLink1URL=http://www.national.com/ds/AD/ADC084S021.pdf, ComponentLink2Description="ADC084S021 Web Page", ComponentLink2URL=http://www.national.com/pf/AD/ADC084S021.html, ComponentLink3Description="MUB10A Package Page", ComponentLink3URL=http://www.national.com/packaging/folders/mub10a.html, CompType="ADC IC", DatasheetVersion=Aug-2008, PackageDescription="Mini-SO, Molded, .118 x .118 x .034in Body, 10 Lead, .0197in Pitch", PackageReference=MUB10A, PackageVersion="revB, Jul-2003", PinCount=10, RevisionNote="Component URLs added", RoHS=Y
U7: library part CMP-2000-05006-2, "IC FLASH 32M SPI 104MHZ 8SOIC", Ambient Temperature Range High=+85°C, Ambient Temperature Range Low=-40°C, Frequency=104MHz, Manufacturer=Winbond, Max Supply Voltage=3.6V, Min Supply Voltage=2.7V, Nominal Supply Current=8-20mA, Package=SS, Temperature="-40°C to +85°C", Access Time=7ns, Automotive=No, Category=IC, ComponentLink2Description=Datasheet, ComponentLink2URL=https://www.winbond.com/resource-files/w25q32fv%20revj%2006032016.pdf, Device Class L1="Integrated Circuits (ICs)", Device Class L2=Memory, Device Class L3=Flash, Digikey Description="IC FLASH 32M SPI 104MHZ 8SOIC", Footprint Url=http://www.winbond.com/resource-files/an0000009%20spiflash%20pcb%20layout%20guideline%20v2.0%2009252017.pdf?__locale=en, Height=2.16mm, Interface=SPI,Other, Ipc Land Pattern Name=SOIC127P790X195-8, Lead Free=Yes, Manufacturer Part Number=W25Q32FVSSIG, Memory Size=32Mbits, Memory Type=FLASH, Obsolete Part=true, Octopart=https://octopart.com/w25q32fvssig-winbond-23896462, RoHS=TRUE, Standoff Height=0.05mm, Temperature Range High=+85°C, Temperature Range Low=-40°C
U8 U11: library part CMP-12756-000030-1, "IC REG LINEAR 3.3V 1A SOT223-3", Case/Package=SOT-223, Dropout Voltage=1.11V, Max Input Voltage=18V, Max Operating Temperature=125°C, Max Output Current=1A, Max Power Dissipation=15W, Min Current Limit=1.1A, Min Input Voltage=2.7V, Min Operating Temperature=-40°C, Min Output Voltage=3.3V, Output Voltage Accuracy=2%, Package Quantity=1000, Quiescent Current=10mA, Accuracy=2%, Height=1.7mm, Lead Free="Lead Free", Length=6.7mm, Mount="Surface Mount", Nominal Output Voltage=3.3V, Number of Outputs=1, Number of Pins=3, Number of Regulators=1, Output Current=1A, Output Type=Fixed, Output Voltage=3.3V, Packaging="Tape and Reel", Polarity=Positive, Power Dissipation=15W, Radiation Hardening=No, REACH SVHC="No SVHC", Reference Voltage=3.3V, Tolerance=2%, Weight=0.000282oz, Width=3.7mm
U9: library part CMP-04917-000285-1, "IC REG LINEAR 1.1V 300MA SOT23-5", Case/Package=SOT-23-5, Dropout Voltage=460mV, Max Input Voltage=5.5V, Max Operating Temperature=125°C, Max Output Current=300mA, Min Current Limit=360mA, Min Input Voltage=1.4V, Min Operating Temperature=-40°C, Nominal Output Voltage=1.1V, Operating Supply Current=34uA, Package Quantity=250, Power Supply Rejection Ratio (PSRR)=68dB, Quiescent Current=60uA, Accuracy=1%, Lead Free="Lead Free", Mount="Surface Mount", Number of Outputs=1, Number of Pins=5, Number of Regulators=1, Output Current=300mA, Output Type=Fixed, Output Voltage=1.1V, Packaging="Tape and Reel", Polarity=Positive, REACH SVHC="No SVHC", RoHS Compliant=Yes, Weight=0.000557oz
U10: library part CMP-12756-000031-1, "IC REG LINEAR 1.8V 150MA SOT23", Case/Package=SOT-23, Dropout Voltage=300mV, Max Input Voltage=6V, Max Operating Temperature=85°C, Max Output Current=150mA, Min Input Voltage=2V, Min Operating Temperature=-40°C, Operating Supply Current=25uA, Output Voltage=1.8V, Package Quantity=3000, Power Supply Rejection Ratio (PSRR)=65dB, Quiescent Current=50uA, Accuracy=2%, Height=1.1mm, Lead Free="Lead Free", Length=3mm, Mount="Surface Mount", Number of Outputs=1, Number of Pins=3, Number of Regulators=1, Output Current=150mA, Output Type=Fixed, Packaging="Tape and Reel", Polarity=Positive, Weight=0.000282oz, Width=1.4mm
Y1: library part CMP-27762-013668-1, "Crystal 25MHz ±20ppm 18pF SMD-4 3.2mm x 2.5mm", Case/Package=CSMD, ESR (Equivalent Series Resistance)=50R, Frequency=25MHz, Frequency Stability=50ppm, Frequency Tolerance=20ppm, Load Capacitance=18pF, Max Operating Temperature=70°C, Min Operating Temperature=-20°C, Operating Frequency="25 MHz", Package Quantity=1000, Resistor Type=Ceramic, Depth=2.5mm, Height=0.031inch, Lead Free="Lead Free", Length=3.2mm, Mount="Surface Mount", Number of Pins=4, Packaging="Tape and Reel", Radiation Hardening=No, REACH SVHC="No SVHC", Series=ABM8, Series Resistance=50R, Termination=SMD/SMT, Tolerance=20ppm, Width=0.098inch

## Via types
v1: diameter 0.5, hole 0.3, Top Layer to Bottom Layer, 6 vias
v2: diameter 0.5, hole 0.2, Top Layer to Bottom Layer, 2 vias

## Nets (pads, with @x,y where several pads share a name; then routed paths per layer and width w, separated by ;. In a path a pad name is that pad's centre, name@x,y a point inside that pad or via, vN(x,y) a via of type N, cw(c..) or ccw(c..) an arc to the next point about the centre after c; other vN are vias at no path point)
1V1: C24.2 C25.2 C26.2 C27.2 C28.2 C29.2 C30.2 C31.2 C32.2 C33.2 C69.2 U1.14 U1.30 U1.51 U1.61 U1.81 U9.5
1V8: C61.2 C71.2 U7.8 U10.2
A0: R18.1 R20.2 U3.3
A1: R19.1 R21.2 U3.30
A3V3: C42.2 C45.2 C46.2 C48_FB1.2 C48_FB2.2 C49_FB1.2 C49_FB2.2 C57.2 C58.2 C72.2 P2.6 U2.8 U3.8 U3.23 U4_FB1.3 U4_FB2.3 U5.4 U11.2 U11.4
"ADC CS": U1.75 U6.1
"Au In_FB1": C54_FB1.1 R29_FB1.1 | length 0.8
  Top Layer w0.254: C54_FB1.1@107.325,44.125 R29_FB1.1
"Au In_FB2": C54_FB2.1 R29_FB2.1 | length 0.8
  Top Layer w0.254: R29_FB2.1 C54_FB2.1@126.725,45.625
CM: C34.1 C36.2 C38.1 R10.1 R14.1 U3.7 U4_FB1.2 U4_FB2.2
D3V3: C3.2 C4.2 C5.2 C6.2 C7.2 C8.2 C9.2 C10.2 C11.2 C12.2 C14.2 C15.2 C16.2 C17.2 C18.2 C19.2 C20.2 C21.2 C22.2 C23.2 C41.2 C44.2 C62.2 C63.2 C66.2 C68.2 C70.2 R2.2 R3.2 R4.2 R5.2 R9.2 R18.2 R19.2 U1.4 U1.11 U1.17 U1.22 U1.26 U1.36 U1.41 U1.49 U1.50 U1.55 U1.62 U1.72 U1.82 U3.1 U6.2 U8.2 U8.4 U9.1 U10.3
DVDDOUT: C43.2 C47.2 U3.24
"F CS": U1.23 U7.1 | length 13.7
  Top Layer w0.13: U1.23 113.596,60.293 113.96,59.93 116.73,59.93 121.165,64.365 122.158,64.365 123.325,65.532
GND: C1.1 C2.1 C3.1 C4.1 C5.1 C6.1 C7.1 C8.1 C9.1 C10.1 C11.1 C12.1 C13.1 C14.1 C15.1 C16.1 C17.1 C18.1 C19.1 C20.1 C21.1 C22.1 C23.1 C24.1 C25.1 C26.1 C27.1 C28.1 C29.1 C30.1 C31.1 C32.1 C33.1 C36.1 C41.1 C42.1 C43.1 C44.1 C45.1 C46.1 C47.1 C48_FB1.1 C48_FB2.1 C49_FB1.1 C49_FB2.1 C50_FB1.2 C50_FB2.2 C51_FB1.1 C51_FB2.1 C56_FB1.1 C56_FB2.1 C57.1 C58.1 C59.1 C60.1 C61.1 C62.1 C63.1 C64.1 C65.1 C66.1 C67.1 C68.1 C69.1 C70.1 C71.1 C72.1 C73.1 P2.5 R1.1 R6.1 R7.1 R20.1 R21.1 R29_FB1.2 R29_FB2.2 R34.1 SW1.3 SW1.4 SW1.5 U1.76 U1.89 U2.4 U2.9 U3.9 U3.22 U3.25 U4_FB1.6 U4_FB1.7 U4_FB1.9 U4_FB2.6 U4_FB2.7 U4_FB2.9 U5.11 U6.3 U7.4 U8.1 U9.2 U10.1 U11.1 Y1.2 Y1.4
  other v2: 336.55,51.52 336.55,52.62
HOLD: U1.24 U7.7 | length 28.7
  Top Layer w0.13: U1.24 113.464,60.793 113.862,60.395 114.067,60.19 116.608,60.19 121.043,64.625 122.05,64.625 123.065,65.64 123.065,75.835 122.8,76.1 119.8,76.1 119.515,75.815 U7.7
IN_N1: C51_FB1.2 R24_FB1.2 U3.11 | length 15.2
  Top Layer w0.254: C51_FB1.2 R24_FB1.2 113.063,51.125 114.871,49.317 v1(114.933,49.317) ; v1(120.673,53.775) 120.626,53.822 120.626,54.014 120.573,54.067 120.573,54.491 120.75,54.668 U3.11
  GND w0.254: v1(114.933,49.317) 114.972,49.317 115.205,49.55 117.059,49.55 118.782,51.273 119.266,51.273 120.577,52.584 120.577,53.487 120.626,53.536 120.626,53.728 v1(120.673,53.775)
IN_N2: C51_FB2.2 R24_FB2.2 U3.13 | length 7.6
  Top Layer w0.254: C51_FB2.2 R24_FB2.2 119.725,50.263 v1(120.721,51.259) ; U3.13 121.758,55.467 121.758,52.609 v1(121.925,52.442)
  GND w0.254: v1(120.721,51.259) 120.732,51.259 121.914,52.442 v1(121.925,52.442)
IN_P1: C56_FB1.2 R30_FB1.2 U3.10 | length 14.2
  Top Layer w0.254: C56_FB1.2 R30_FB1.2 v1(112.975,48.4) ; v1(119.973,53.775) 120.02,53.822 120.02,54.014 120.073,54.067 120.073,54.698 120.25,54.875 U3.10
  GND w0.254: v1(112.975,48.4) 114.633,50.058 116.849,50.058 118.572,51.781 119.056,51.781 120.069,52.794 120.069,53.487 120.02,53.536 120.02,53.728 v1(119.973,53.775)
IN_P2: C56_FB2.2 R30_FB2.2 U3.12 | length 7.5
  Top Layer w0.254: U3.12@121.25,55.861 121.25,51.488 122.45,50.288 R30_FB2.2 C56_FB2.2
MCLK: U1.12 U3.2
MISO: U1.28 U7.2 | length 10.4
  Top Layer w0.13: U1.28 118.068,62.793 119.515,64.24 U7.2
"MISO 1": U1.80 U6.9
MOSI: U1.27 U7.5 | length 19.8
  Top Layer w0.13: U1.27 112.818,62.293 113.058,62.533 118.208,62.533 120.19,64.515 120.19,68.917 121.72,70.447 121.72,74.215 U7.5
"MOSI 1": U1.78 U6.8
NetC1_2: C1.2 R8.1 Y1.1
NetC13_2: C13.2 U1.43 U3.29
NetC34_2: C34.2 R10.2 R11.1 U2.3
NetC35_1: C35.1
NetC35_2: C35.2 C37.1 R13.2 U2.1
NetC37_2: C37.2 R12.1 R13.1 U2.2
NetC38_2: C38.2 R14.2 R15.1 U2.5
NetC39_1: C39.1
NetC39_2: C39.2 C40.1 R17.2 U2.7
NetC40_2: C40.2 R16.1 R17.1 U2.6
NetC50_FB1_1: C50_FB1.1 R22_FB1.1 | length 1
  Top Layer w0.254: R22_FB1.1 107.4,54.45
NetC50_FB2_1: C50_FB2.1 R22_FB2.1 | length 1
  Top Layer w0.254: R22_FB2.1 116.4,45.7
NetC52_FB1_1: C52_FB1.1 R23_FB1.2 U4_FB1.8 | length 2.6
  Top Layer w0.254: R23_FB1.2 108.1,52.85 108.1,52.8 107.7,52.4 U4_FB1.8
NetC52_FB1_2: C52_FB1.2 R24_FB1.1 R25_FB1.1 U4_FB1.5 | length 4
  Top Layer w0.254: R25_FB1.1 108.9,53.1 108.9,52.8 109.2,52.5 U4_FB1.5@109.2,51.107 ; U4_FB1.5 U4_FB1.5@109.2,51.107 ; R24_FB1.1 110.513,51.113 109.206,51.113 U4_FB1.5@109.2,51.107
NetC52_FB2_1: C52_FB2.1 R23_FB2.2 U4_FB2.8 | length 2.6
  Top Layer w0.254: R23_FB2.2 118,46.4 118.05,46.4 118.45,46 U4_FB2.8
NetC52_FB2_2: C52_FB2.2 R24_FB2.1 R25_FB2.1 U4_FB2.5 | length 4
  Top Layer w0.254: R25_FB2.1 118.05,47.2 118.35,47.5 U4_FB2.5@119.743,47.5 ; R24_FB2.1 119.737,48.813 119.737,47.506 U4_FB2.5@119.743,47.5 ; U4_FB2.5 U4_FB2.5@119.743,47.5
NetC53_FB1_1: C53_FB1.1 R26_FB1.2 R27_FB1.1 R28_FB1.2 | length 5.6
  Top Layer w0.254: C53_FB1.1 105.7,48.725 106.45,47.975 R26_FB1.2 R27_FB1.1 R28_FB1.2
NetC53_FB1_2: C53_FB1.2 R22_FB1.2 R23_FB1.1 R25_FB1.2 | length 5.5
  Top Layer w0.254: C53_FB1.2 105.7,50.775 106.45,51.525 R22_FB1.2 R25_FB1.2
NetC53_FB2_1: C53_FB2.1 R26_FB2.2 R27_FB2.1 R28_FB2.2 | length 5.6
  Top Layer w0.254: C53_FB2.1 122.125,44 122.875,44.75 R26_FB2.2 R27_FB2.1 R28_FB2.2
NetC53_FB2_2: C53_FB2.2 R22_FB2.2 R23_FB2.1 R25_FB2.2 | length 5.5
  Top Layer w0.254: R25_FB2.2 R22_FB2.2 119.325,44.75 120.075,44 C53_FB2.2
NetC54_FB1_2: C54_FB1.2 R26_FB1.1 | length 0.9
  Top Layer w0.254: C54_FB1.2 R26_FB1.1
NetC54_FB2_2: C54_FB2.2 R26_FB2.1 | length 0.9
  Top Layer w0.254: R26_FB2.1 C54_FB2.2
NetC55_FB1_1: C55_FB1.1 R28_FB1.1 R30_FB1.1 U4_FB1.4 | length 5.4
  Top Layer w0.254: R28_FB1.1 108.9,46.6 109.2,46.9 109.2,47.5 ; U4_FB1.4 109.2,47.5 ; U4_FB1.4 R30_FB1.1 ; 110.15,46.55 109.2,47.5
NetC55_FB1_2: C55_FB1.2 R27_FB1.2 U4_FB1.1 | length 2.7
  Top Layer w0.254: R27_FB1.2 108.1,46.55 108.1,46.6 108.025,46.675 107.7,47 U4_FB1.1
NetC55_FB2_1: C55_FB2.1 R28_FB2.1 R30_FB2.1 U4_FB2.4 | length 5.4
  Top Layer w0.254: R30_FB2.1 U4_FB2.4 123.35,47.5 ; 124.3,48.45 123.35,47.5 ; R28_FB2.1 124.25,47.2 123.95,47.5 123.35,47.5
NetC55_FB2_2: C55_FB2.2 R27_FB2.2 U4_FB2.1 | length 2.7
  Top Layer w0.254: U4_FB2.1 123.85,46 124.175,46.325 124.25,46.4 C55_FB2.2 R27_FB2.2
NetC59_2: C59.2 R31.1 U6.7 | length 4.4
  Top Layer w0.254: U6.7 93.959,57.866 95.009,57.866 95.4,57.475 95.4,56.775 94.9,56.275 R31.1 C59.2
NetC60_2: C60.2 R32.1 U6.6 | length 2.8
  Top Layer w0.254: C60.2 R32.1 93.298,55.773 93.298,56.192 93.95,56.844 U6.6
NetC64_2: C64.2 R33.1 U6.5 | length 2.8
  Top Layer w0.254: U6.5 89.85,56.844 90.477,56.217 90.477,55.748 90.55,55.675 C64.2 R33.1
NetC65_2: C65.2 R35.1 U6.4 | length 4.5
  Top Layer w0.254: R35.1 C65.2 88.9,56.175 88.4,56.675 88.4,57.575 88.7,57.875 U6.4
NetD1_1: D1.1 R1.2
NetD1_2: D1.2 U1.65
NetP1_1: P1.1 U1.10
NetP1_2: P1.2 U1.9
NetP1_3: P1.3 U1.8
NetP1_4: P1.4 U1.7
NetP1_5: P1.5 U1.6
NetP1_6: P1.6 U1.5
NetP2_1: P2.1 U5.3
NetP2_2: P2.2 U5.5
NetP2_3: P2.3 U5.10
NetP2_4: P2.4 U5.12
NetR2_1: R2.1 R6.2 U1.67
NetR3_1: R3.1 R7.2 U1.66
NetR4_1: R4.1 U1.19 U3.32
NetR5_1: R5.1 U1.18 U3.31
NetR31_2: R31.2 U5.1 U5.2 | length 13.7
  Top Layer w0.254: U5.1 U5.2 94.356,46.175 96.595,46.175 ccw(c96.595,46.429) 96.774,46.249 97.426,46.901 ccw(c97.246,47.08) 97.5,47.08 97.5,51.57 ccw(c97.246,51.57) 97.426,51.749 ; R31.2 94.9,54.275 97.426,51.749
NetR32_2: R32.2 U5.6 U5.7 | length 4.1
  Top Layer w0.254: R32.2 93.254,54.821 93.254,54.269 94.316,53.207 U5.7 U5.6
NetR33_2: R33.2 U5.8 U5.9 | length 4.9
  Top Layer w0.254: U5.9 U5.8 90.182,52.485 90.352,52.655 90.352,53.177 91.4,54.225 R33.2
NetR35_2: R35.2 U5.13 U5.14 | length 13.2
  Top Layer w0.254: 88.604,53.875 ccw(c88.605,53.621) 88.426,53.801 87.449,52.824 ccw(c87.629,52.645) 87.375,52.645 87.375,46.779 ccw(c87.629,46.78) 87.448,46.602 87.842,46.208 ccw(c88.02,46.389) 88.019,46.135 U5.13 U5.14 ; 88.605,53.875 89.3,53.875 89.7,54.275 R35.2
NetU1_15: U1.15 U9.3
NetU1_42: U1.42 U3.27
NetU1_44: U1.44 U3.26
NetU1_45: U1.45 U3.28
OUT+1: U3.18
OUT+2: U3.15
"OUT+ 1": R11.2
"OUT+ 2": R15.2
OUT-1: U3.17
OUT-2: U3.16
"OUT- 1": R12.2
"OUT- 2": R16.2
RST: R9.1 SW1.1 SW1.2 U1.68
"SCLK 1": U1.88 U6.10
"SPI CLK": R34.2 U1.29 U7.6 | length 17.8
  Top Layer w0.13: U1.29 112.743,63.293 112.961,63.075 116.625,63.075 117.125,63.575 117.125,68.54 120.785,72.2 U7.6
SYS_CLKIN: C2.2 U1.57 Y1.3
SYS_XTAL: R8.2 U1.56
VCC: C67.2 C73.2 U8.3 U11.3
WP: U1.25 U7.3 | length 12.7
  Top Layer w0.13: U1.25 113.332,61.293 114.175,60.45 116.5,60.45 120.785,64.735 U7.3
pads on no net: U1.1 U1.2 U1.3 U1.13 U1.16 U1.20 U1.21 U1.31 U1.32 U1.33 U1.34 U1.35 U1.37 U1.38 U1.39 U1.40 U1.46 U1.47 U1.48 U1.52 U1.53 U1.54 U1.58 U1.59 U1.60 U1.63 U1.64 U1.69 U1.70 U1.71 U1.73 U1.74 U1.77 U1.79 U1.83 U1.84 U1.85 U1.86 U1.87 U3.4 U3.5 U3.6 U3.14 U3.19 U3.20 U3.21 U3.33 U9.4

## Text inside footprints (layer, text, board x,y; h text height)
P1: Top Overlay "1" at 198.415,19.184 h0.38 r90; Top Overlay "6" at 198.415,31.624 h0.38 r90
P2: Top Overlay "1" at 28.5,60.63 h0.38 r90; Top Overlay "6" at 28.5,73.07 h0.38 r90